# Altium PCB ISL6236A_DEMO.PcbDoc
Units mm, origin at the board's own origin, x right, y up, seen from the top; angles counter-clockwise.
Board outline 50 x 50 mm, 6 copper layers (L1, L2, L3, L4, L5, L6); 41 components, 27 nets, 119 pads, 54 vias.
Unrouted connection lines stored in the file: 1.
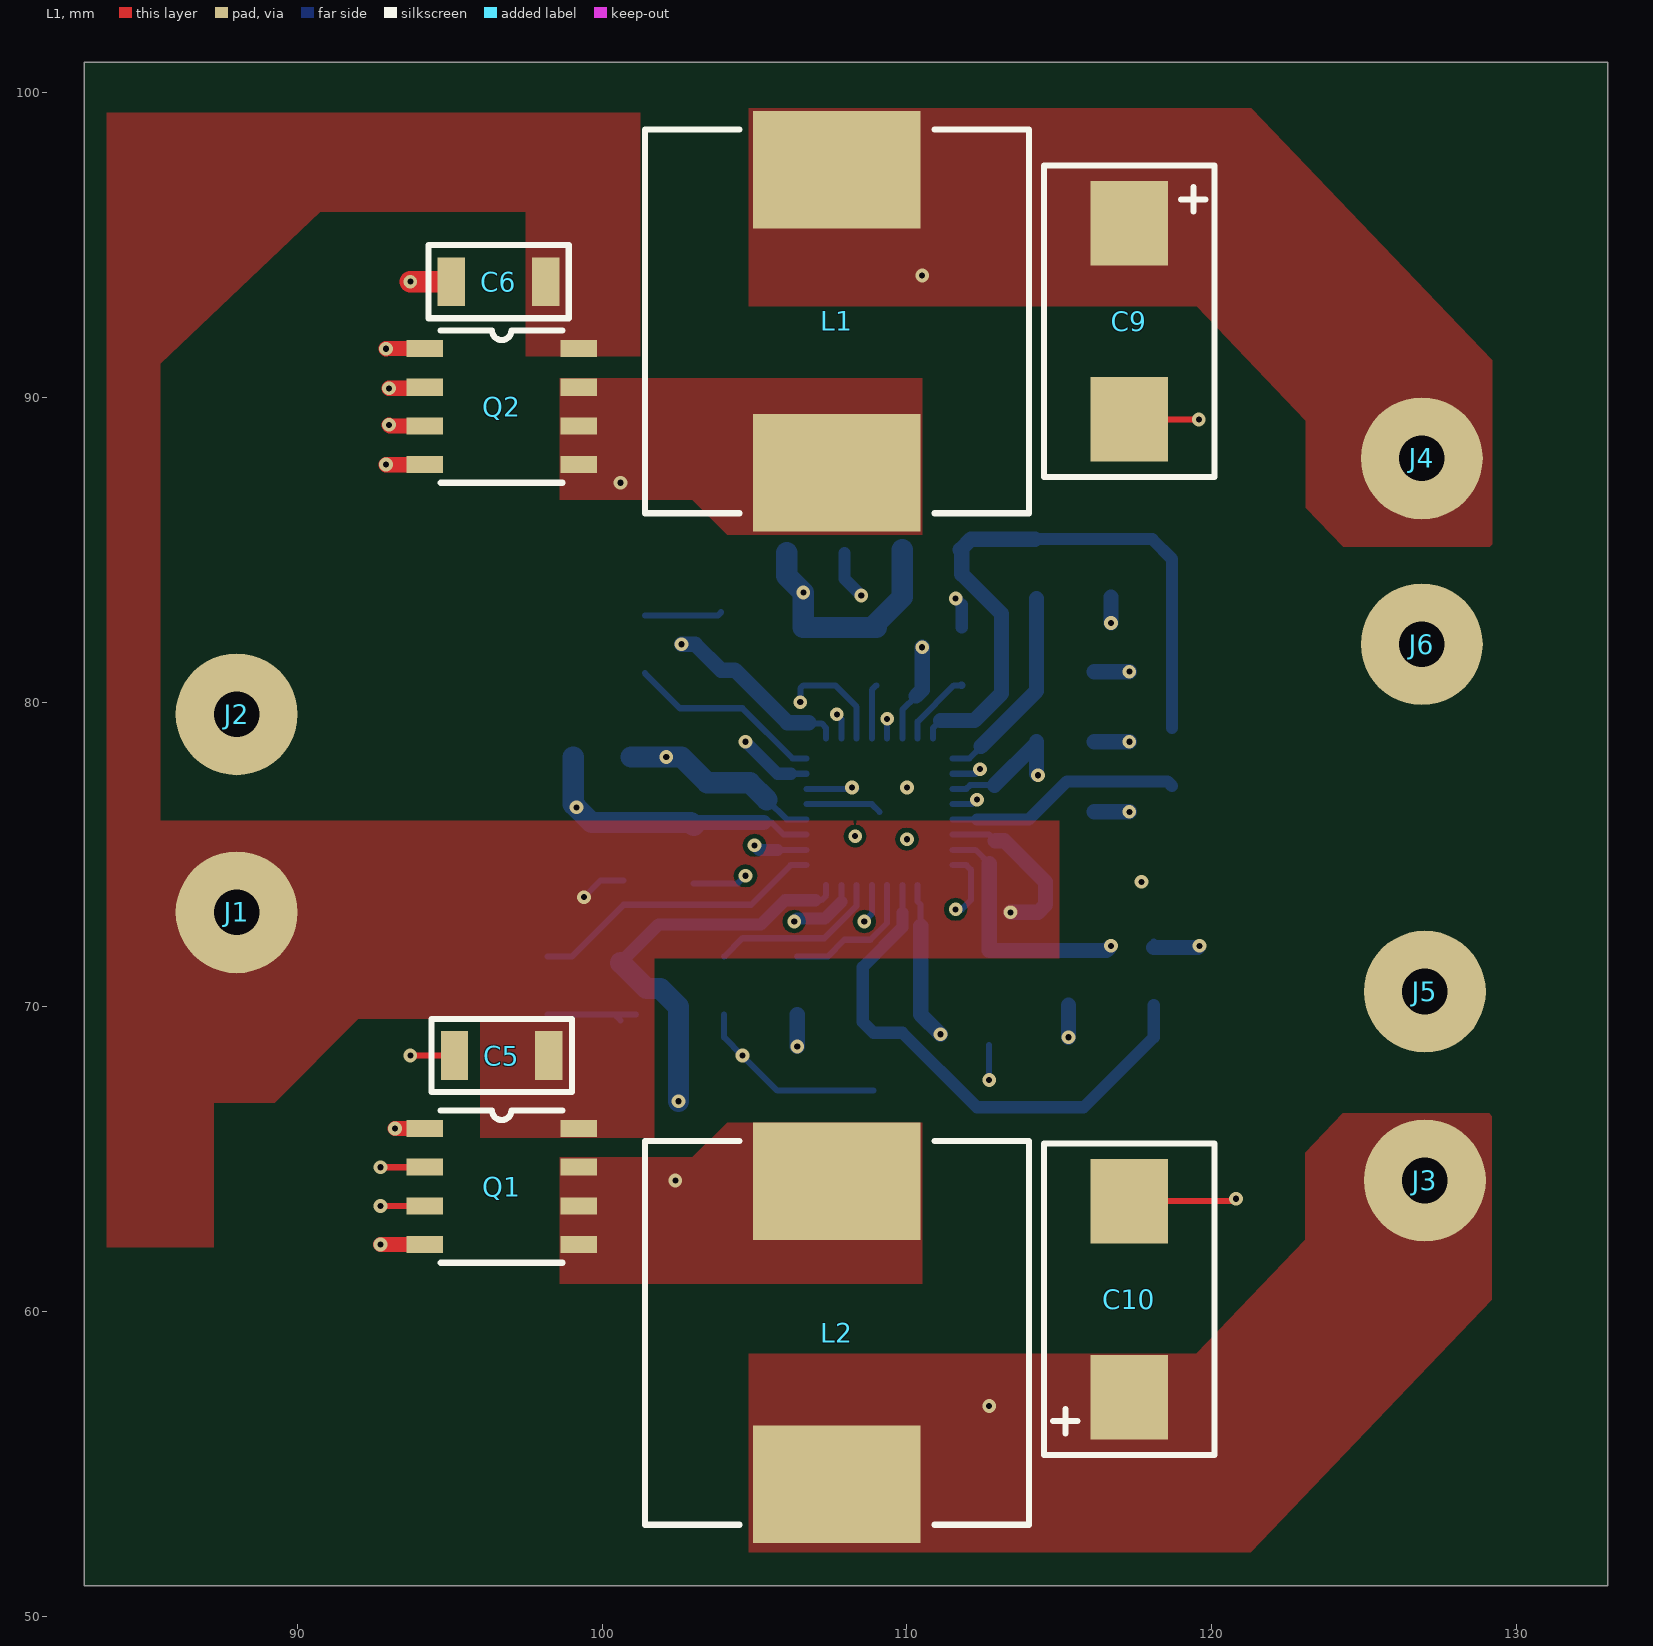
[diagram p0: L1 view]
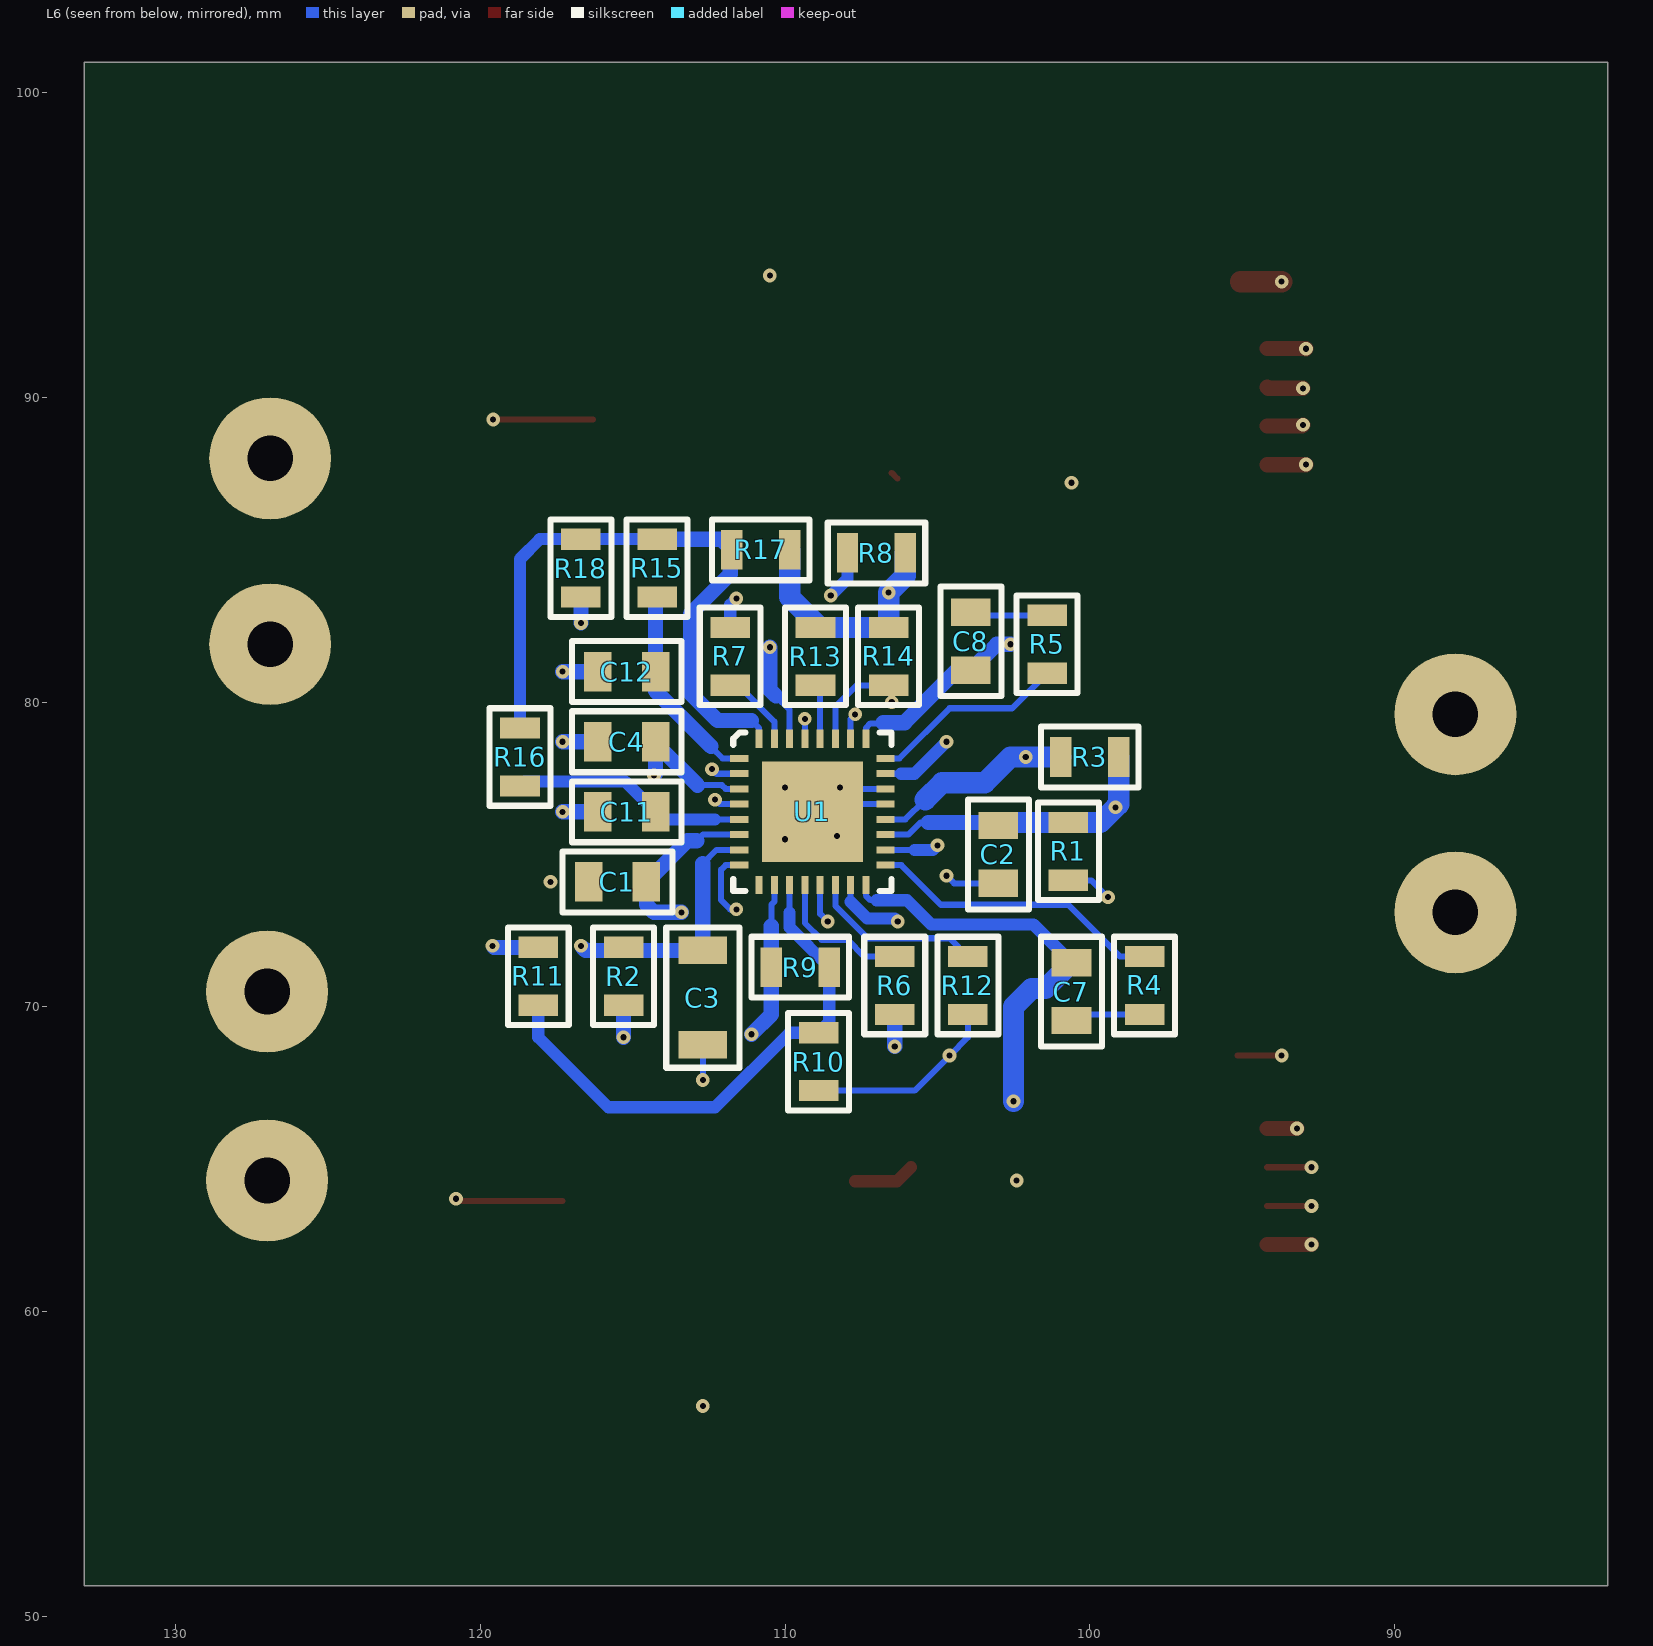
[diagram p1: L6 view, seen from below]
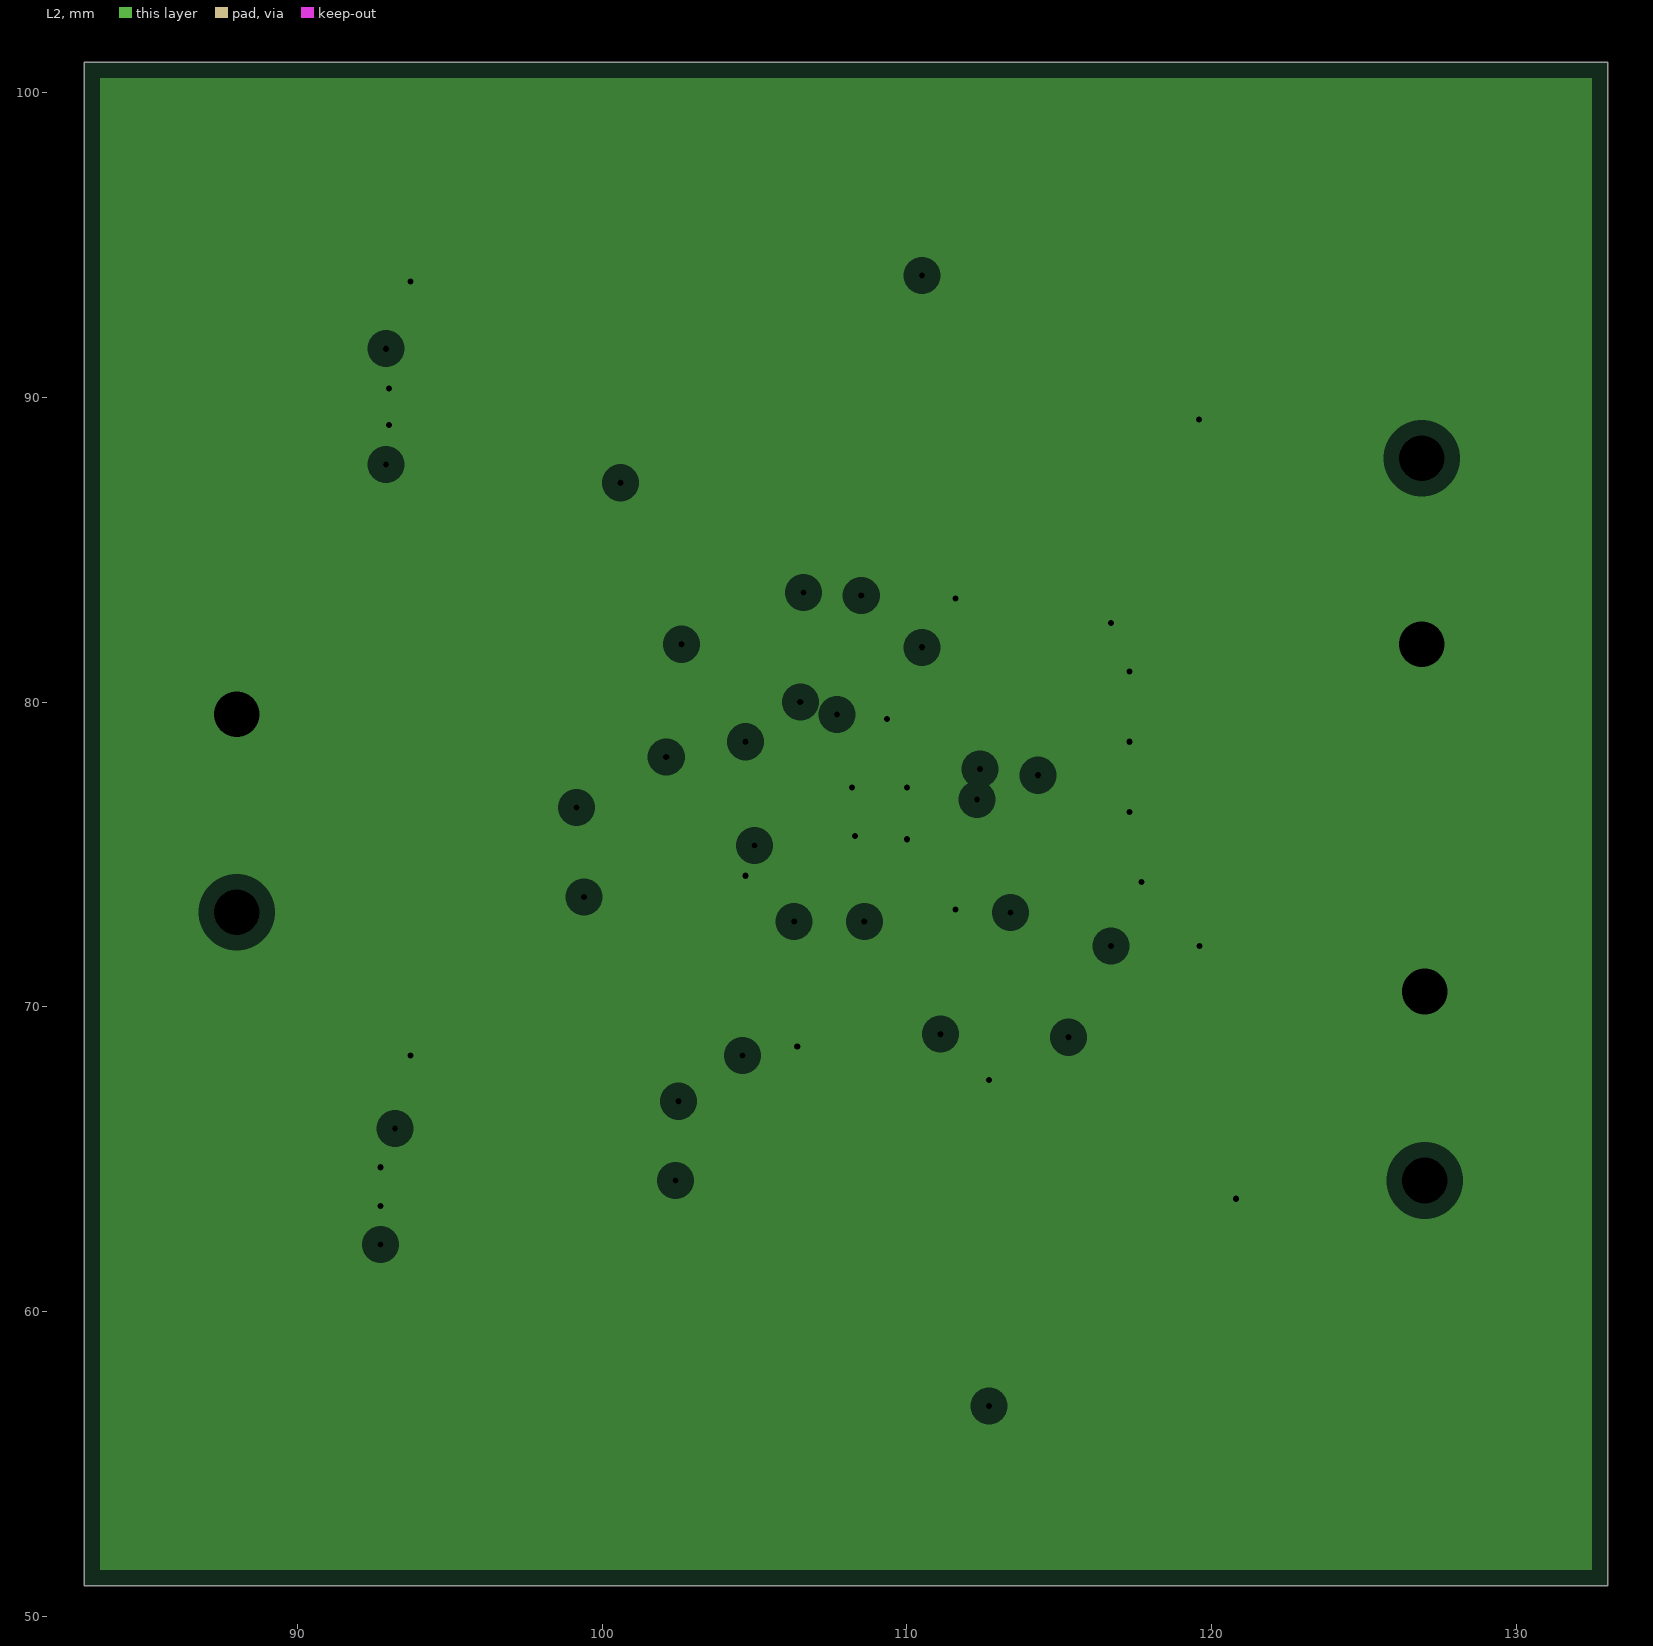
[diagram p2: L2, clearances drawn from the general rule]
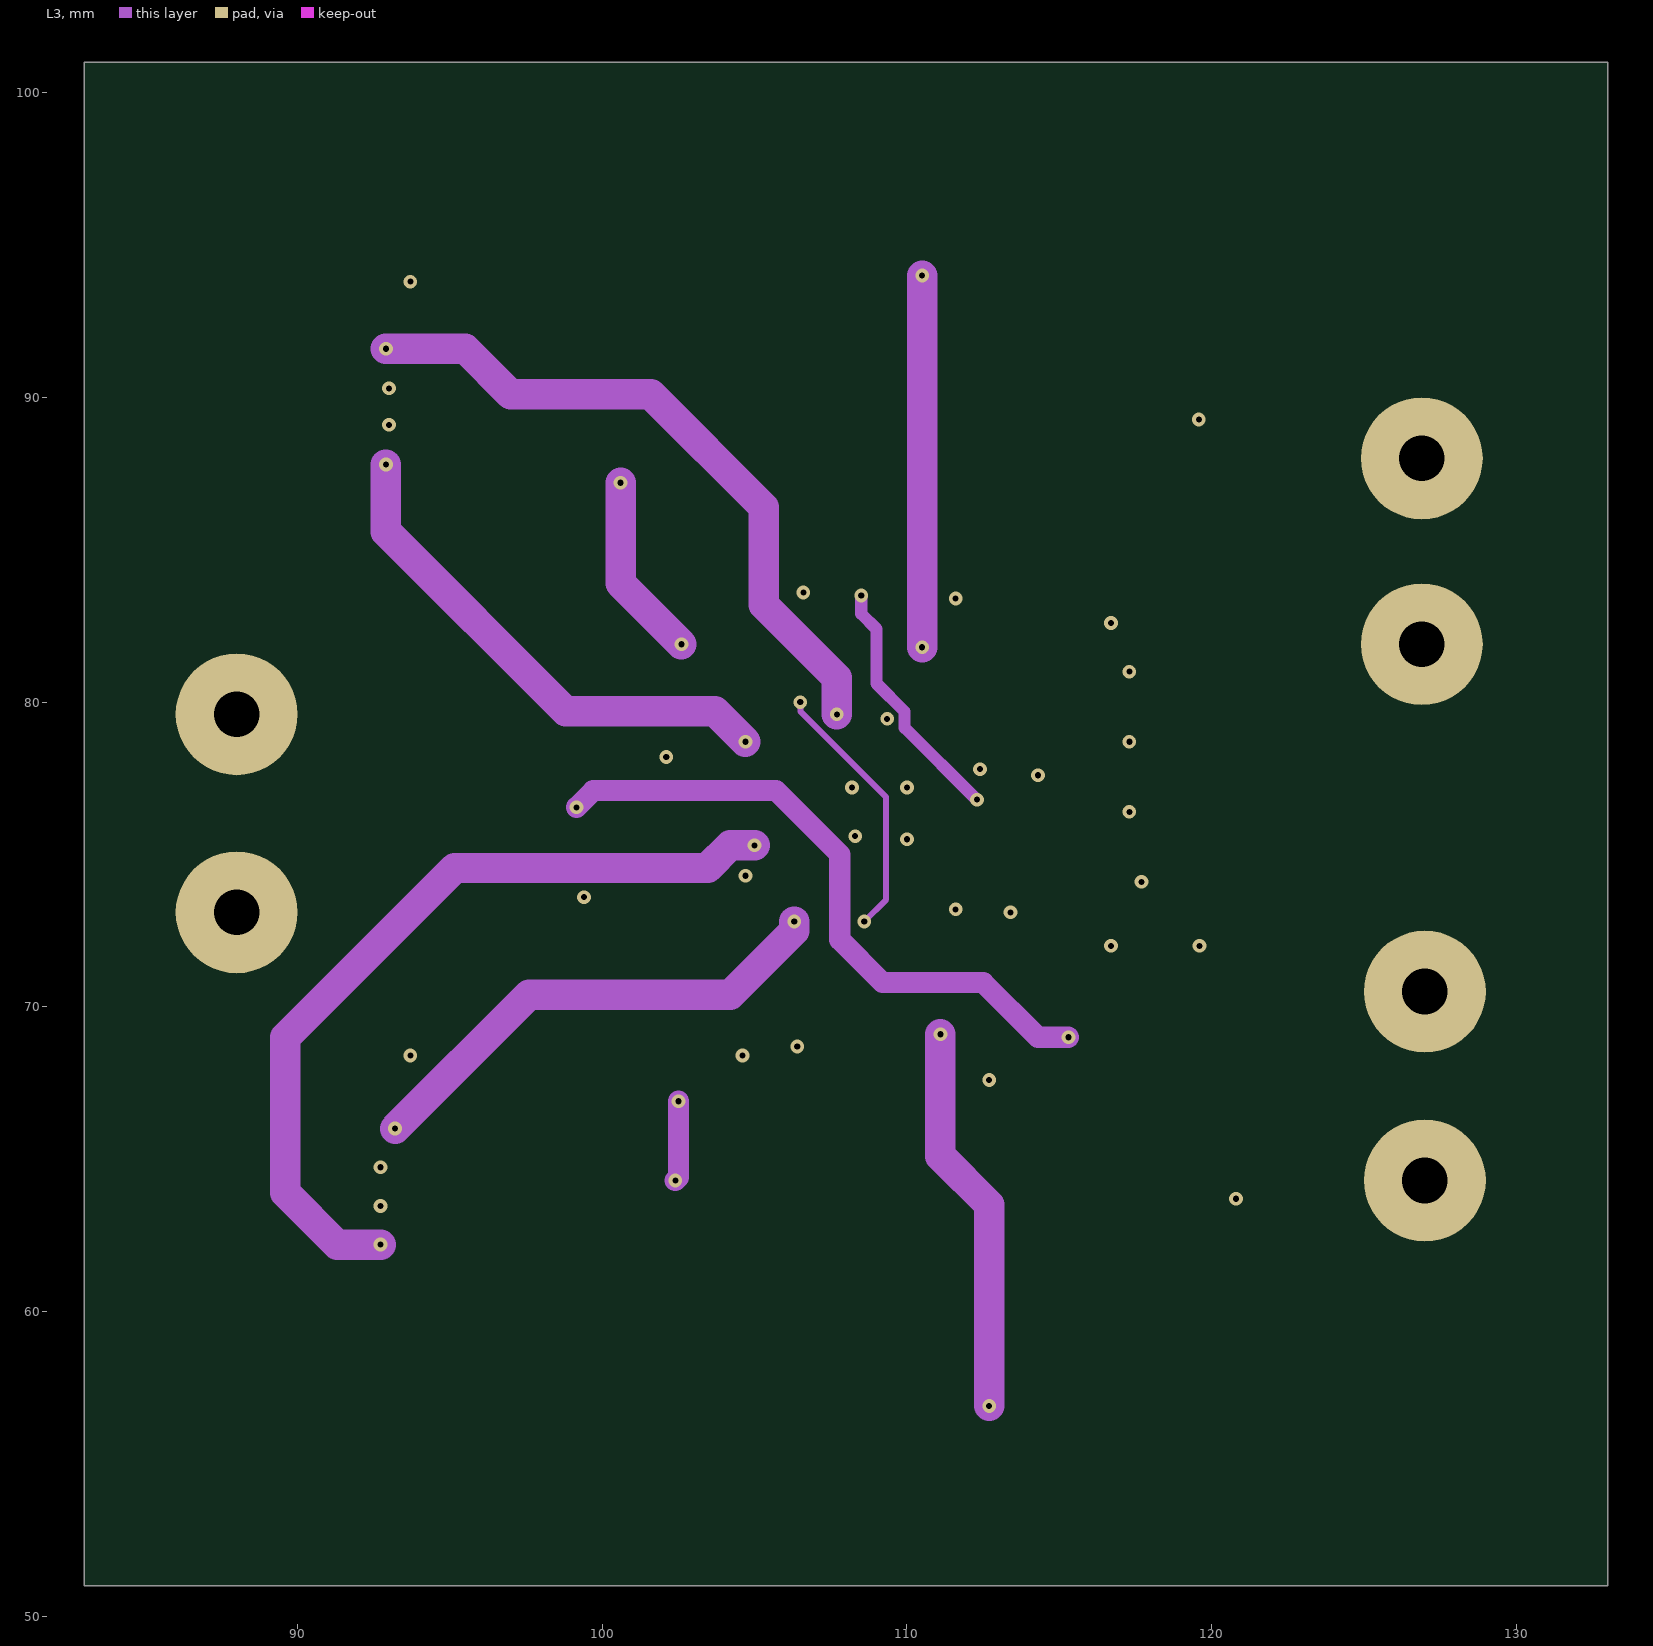
[diagram p3: L3]
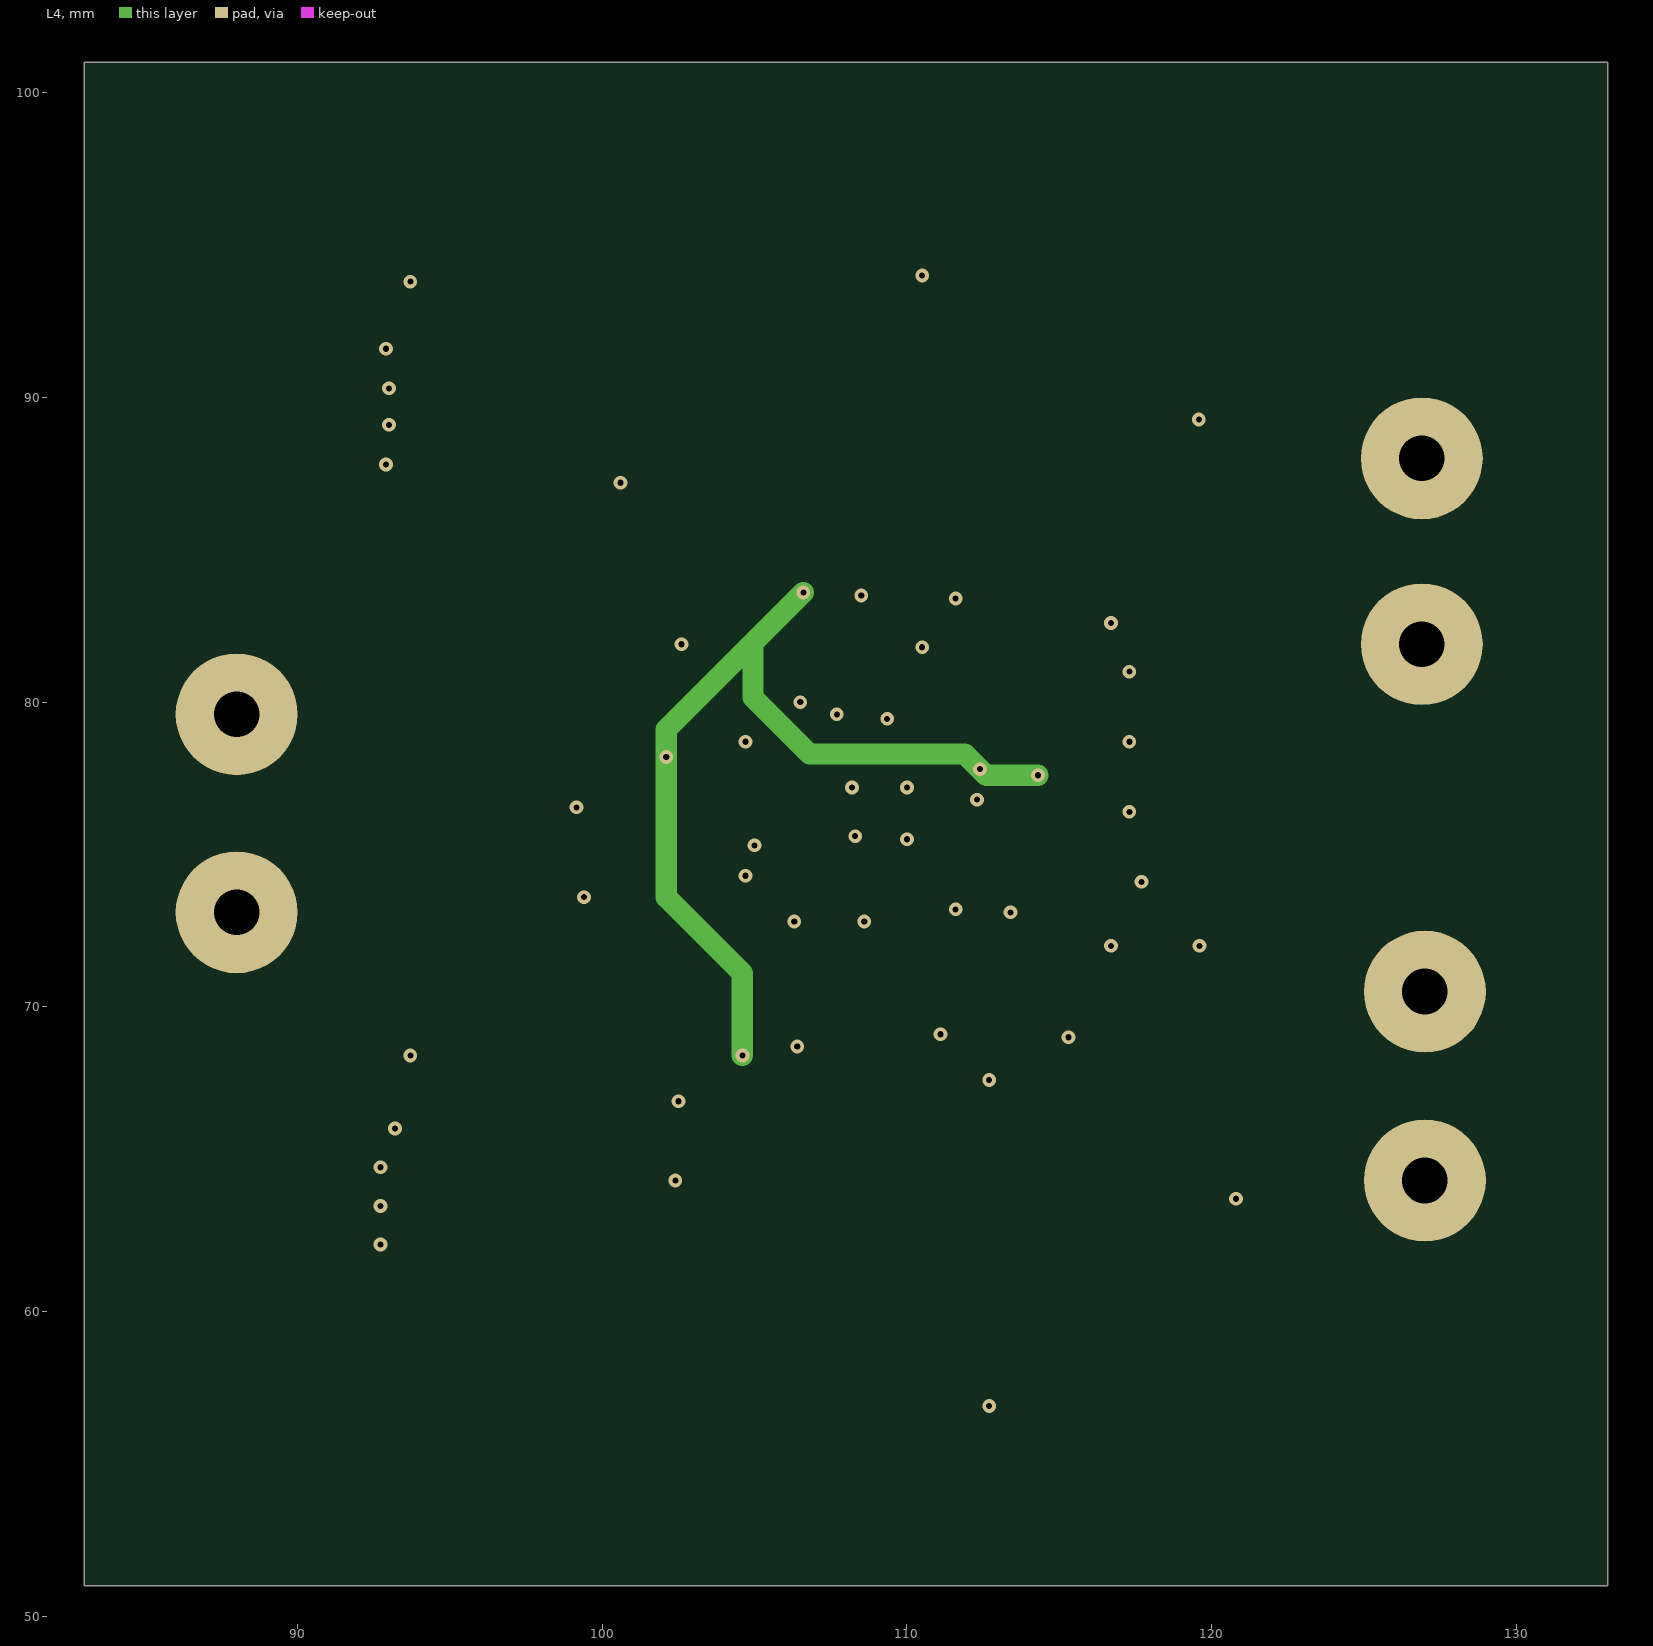
[diagram p4: L4]
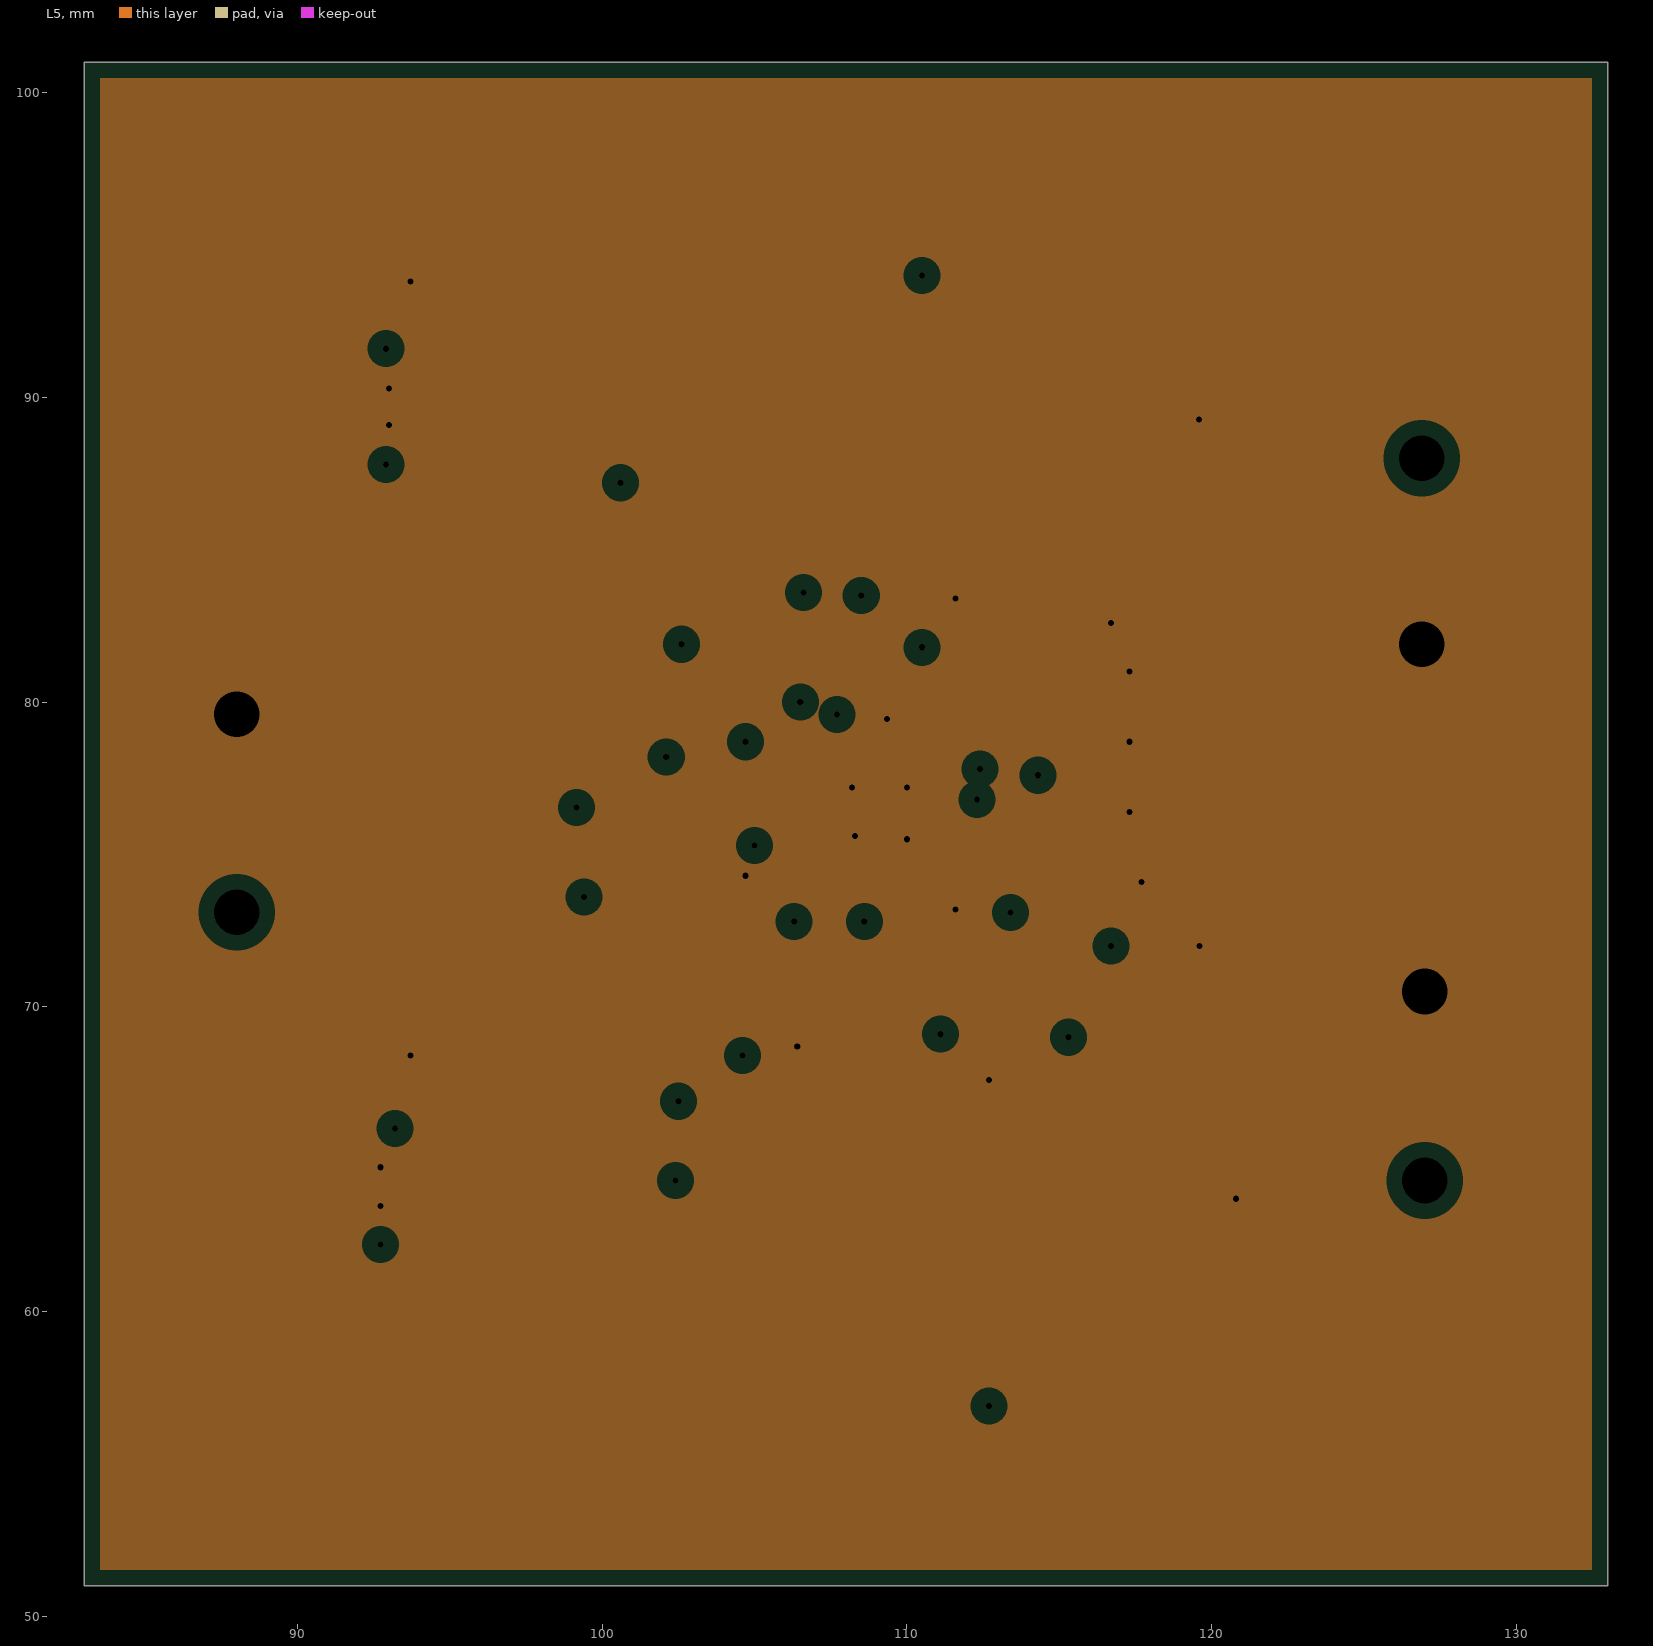
[diagram p5: L5, clearances drawn from the general rule]

## Layer stack, top to bottom
L1: signal copper 0.0356
Dielectric: core 0.32, FR-4, Dk 4.8
L2: plane copper 0.0356, net GND
Dielectric: prepreg 0.32, FR-4, Dk 4.8
L3: signal copper 0.0356
Dielectric: core 0.32, FR-4, Dk 4.8
L4: signal copper 0.0356
Dielectric: prepreg 0.32, FR-4, Dk 4.8
L5: plane copper 0.0356, net GND
Dielectric: core 0.32, FR-4, Dk 4.8
L6: signal copper 0.0356

## Board outline
83,101 83,51 133,51 133,101 83,101

## Design rules (kind name [scope] priority, off if disabled: settings)
Clearance [All] p1: gap=0.15
ComponentClearance [All] p1: gap=0.1 collisioncheckmode=3 verticalgap=0.1 showdistances=FALSE
HoleSize [All] p1: absolutevalues=TRUE maxlimit=10 minlimit=0.025 maxpercent=80.000 minpercent=20.000
HoleToHoleClearance [All] p1: gap=0.1 allowstackedmicrovias=TRUE
MinimumSolderMaskSliver [All] p1: minsoldermaskwidth=0.1
PlaneClearance [All] p1: clearance=0.508
PlaneConnect [All] p1: planeconnectstyle=Relief reliefexpansion=0.508 reliefentries=4 reliefconductorwidth=0.254 reliefairgap=0.254
PolygonConnect [All] p1: connectstyle=Direct reliefconductorwidth=0.254 reliefentries=4 polygonreliefangle="90 Angle"
RoutingVias [All] p1: holewidth=0.2 width=0.45 viastyle="Through Hole" minholewidth=0.1 minwidth=0.4 maxholewidth=10 maxwidth=10
SilkToSilkClearance [All] p1: silktosilkclearance=0.1
SilkscreenOverComponentPads [All] p1: minsilkscreentomaskgap=0.1
SolderMaskExpansion [All] p1: expansion=0.102
Width [All] p1: maxlimit=10 minlimit=0.15 preferedwidth=0.15
20 further rules are at their usual default settings.

## Components (designator, comment, footprint, x,y, rotation, side; value= is the part's Value field where it differs from the comment)
C1 "1uF" C0805 115.5,74.1 r180 bottom
C2 "1uF" C0805 103,75 r90 bottom
C3 "4.7uF" C1206 112.7,70.3 r90 bottom
C4 "1uF" C0805 115.2,78.7 r0 bottom
C5 "10uF" C1206 96.7,68.4 r0 top
C6 "10uF" C1206 96.6,93.8 r0 top
C7 "220nF" C0805 100.6,70.5 r270 bottom
C8 "220nF" C0805 103.9,82 r270 bottom
C9 "330, 10V, 4mOhm 399-10378-1-ND" C7343-43 117.3,92.5 r270 top
C10 "330UF, 6.3V, 9mOhm  399-10418-1-ND" C7343-31 117.3,60.4 r90 top
C11 "10nF" C0805 115.2,76.4 r0 bottom
C12 "100nF" C0805 115.2,81 r0 bottom
J1 "4mmx1.5m" PAD_WITH_HOLE_4MMx1.5MM#1 88,73.1 r0 top
J2 "4mmx1.5m" PAD_WITH_HOLE_4MMx1.5MM#1 88,79.6 r0 top
J3 "4mmx1.5m" PAD_WITH_HOLE_4MMx1.5MM#2 127.3,68.2 r0 top
J4 "4mmx1.5m" PAD_WITH_HOLE_4MMx1.5MM#3 127.1,88 r0 top
J5 "4mmx1.5m" PAD_WITH_HOLE_4MMx1.5MM#4 127.1,70.5 r0 top
J6 "4mmx1.5m" PAD_WITH_HOLE_4MMx1.5MM#5 130.1,81.9 r0 top
L1 "2.2uF 513-1662-1-ND" DR125 107.7,92.5 r90 top locked
L2 "3.3uF 513-1529-1-ND" DR125 107.7,59.3 r90 top locked
Q1 "SI4816BDY-T1-E3" SO-8 96.7,64.1 r0 top locked
Q2 "SI4816BDY-T1-E3" SO-8 96.7,89.7 r0 top
R1 "0R" R0805 100.7,75.1 r90 bottom
R2 "0R" R0805 115.3,71 r90 bottom
R3 "10R" R0805 100,78.2 r0 bottom
R4 "1R" R0805 98.2,70.7 r90 bottom
R5 "1R" R0805 101.4,81.9 r90 bottom
R6 "200K" R0805 106.4,70.7 r90 bottom
R7 "200K" R0805 111.8,81.5 r90 bottom
R8 "10K" R0805 107,84.9 r180 bottom
R9 "DNF" R0805 109.5,71.3 r0 bottom
R10 "0R" R0805 108.9,68.2 r270 bottom
R11 "DNF" R0805 118.1,71 r270 bottom
R12 "10K" R0805 104,70.7 r270 bottom
R13 "200K" R0805 109,81.5 r90 bottom
R14 "200K" R0805 106.6,81.5 r90 bottom
R15 "DNF" R0805 114.2,84.4 r270 bottom
R16 "0R" R0805 118.7,78.2 r270 bottom
R17 "DNF" R0805 110.8,85 r180 bottom
R18 "DNF" R0805 116.7,84.4 r90 bottom
U1 "ISL6236AIRZ-ND" L32.5x5B 109.1,76.4 r180 bottom locked

## Footprints (in the part's own frame and the unit in brackets; to place one, negate y for a bottom-side part, rotate by r counter-clockwise, add the part's x,y. Pads: shape width x height; smd on the part's side, far side on the other; paste and mask are expansions set on the pad)
C0805 [mm]
  rect 0.9x1.3 smd: 1(-0.95,0) 2(0.95,0)
  silkscreen extent -1.8,-1 1.8,1
C1206 [mm]
  rect 0.9x1.6 smd: 1(-1.55,0) 2(1.55,0)
  silkscreen extent -2.3,-1.2 2.3,1.2
C7343-31 [mm]
  rect 2.77x2.55 smd: 1(-3.22,0) 2(3.22,0)
  silkscreen extent -5.11,-2.8 5.11,2.8
C7343-43 [mm]
  rect 2.77x2.55 smd: 1(-3.22,0) 2(3.22,0)
  silkscreen extent -5.11,-2.8 5.11,2.8
DR125 [mm]
  rect 3.85x5.5 smd: 1(-4.975,0) 2(4.975,0)
  silkscreen extent -6.3,-6.3 6.3,6.3
L32.5x5B [mm]
  rect 0.6x0.23 smd mask+0.051: 1(-2.4,1.75) 2(-2.4,1.25) 3(-2.4,0.75) 4(-2.4,0.25) 5(-2.4,-0.25) 6(-2.4,-0.75) 7(-2.4,-1.25) 8(-2.4,-1.75) 17(2.4,-1.75) 18(2.4,-1.25) 19(2.4,-0.75) 20(2.4,-0.25) 21(2.4,0.25) 22(2.4,0.75) 23(2.4,1.25) 24(2.4,1.75)
  rect 0.23x0.6 smd mask+0.051: 9(-1.75,-2.4) 10(-1.25,-2.4) 11(-0.75,-2.4) 12(-0.25,-2.4) 13(0.25,-2.4) 14(0.75,-2.4) 15(1.25,-2.4) 16(1.75,-2.4) 25(1.75,2.4) 26(1.25,2.4) 27(0.75,2.4) 28(0.25,2.4) 29(-0.25,2.4) 30(-0.75,2.4) 31(-1.25,2.4) 32(-1.75,2.4)
  rect 3.3x3.3 smd mask+0.051: 33(0,0)
  silkscreen extent -2.6,-2.6 2.6,2.6
PAD_WITH_HOLE_4MMx1.5MM#1 [mm]
  round 4 hole 1.5: 1(0,0)
PAD_WITH_HOLE_4MMx1.5MM#2 [mm]
  round 4 hole 1.5: 1(-0.3,-3.9)
PAD_WITH_HOLE_4MMx1.5MM#3 [mm]
  round 4 hole 1.5: 1(-0.2,0)
PAD_WITH_HOLE_4MMx1.5MM#4 [mm]
  round 4 hole 1.5: 1(-0.1,0)
PAD_WITH_HOLE_4MMx1.5MM#5 [mm]
  round 4 hole 1.5: 1(-3.2,0)
R0805 [mm]
  rect 0.7x1.3 smd: 1(-0.95,0) 2(0.95,0)
  silkscreen extent -1.6,-1 1.6,1
SO-8 [mm]
  rect 1.194x0.559 smd: 1(-2.527,1.905) 2(-2.527,0.635) 3(-2.527,-0.635) 4(-2.527,-1.905) 5(2.528,-1.905) 6(2.528,-0.635) 7(2.528,0.635) 8(2.528,1.905)
  silkscreen extent -2,-2.5 2,2.5

## Part data
C1 C2 C4: library part CL21B105KBFNNNE, "CAP CER 1UF 50V 10% X7R 0805"
C3: library part CL31A475KPHNNNE, "CAP CER 4.7UF 10V 10% X5R 1206"
C5 C6: library part GRM32DF51H106ZA01L, "CAP CER 10UF 50V Y5V 1210"
C7 C8: library part UMK212B7224KG-T, "CAP CER 0.22UF 50V 10% X7R 0805"
C9: library part T530X337M010ATE004, "CAP TANT 330UF 10V 20% 2917"
C10: library part T520D337M006ATE009, "CAP TANT 330UF 6.3V 20% 2917"
C11: library part C0805C103K5RACTU, "CAP CER 10000PF 50V 10% X7R 0805"
C12: library part C0805C104K5RACTU, "CAP CER 0.1UF 50V 10% X7R 0805"
J1 J2 J3 J4 J5 J6: library part PAD_WITH_HOLE_4mmx1.5mm, "Pad with hole with 4mmx1.5mm"
L1: library part DR125-2R2-R, "FIXED IND 2.2UH 10.9A 4.5 MOHM"
L2: library part DR125-3R3-R, "FIXED IND 3.3UH 9.26A 6.3 MOHM"
Q1 Q2: "MOSFET 2N-CH 30V 5.8A 8-SOIC"
R1 R2 R10 R16: library part ERJ-6GEY0R00V, "RES 0.0 OHM 1/8W JUMP 0805 SMD"
R3: library part ERJ-6ENF10R0V, "RES 10 OHM 1/8W 1% 0805 SMD"
R4 R5: library part ERJ-6RQF1R0V, "RES 1 OHM 1/8W 1% 0805 SMD"
R6 R7 R13 R14: library part RMCF0805FT200K, "RES 200K OHM 1/8W 1% 0805"
R8 R12: library part ERJ-6GEYJ103V, "RES 10K OHM 1/8W 5% 0805 SMD"
R9 R11 R15 R17 R18: library part RES
U1: library part ISL6236AIRZ, "IC MAIN PWR CTRLR QUAD 32-QFN"

## Via types
v1: diameter 0.45, hole 0.2, L1 to L6, 54 vias

## Nets (pads, with @x,y where several pads share a name; then routed paths per layer and width w, separated by ;. In a path a pad name is that pad's centre, name@x,y a point inside that pad or via, vN(x,y) a via of type N, cw(c..) or ccw(c..) an arc to the next point about the centre after c; other vN are vias at no path point)
+1V5: C10.1 J3.1 L2.1 R9.2 U1.10 | length 18.3
  L1 w0.2: v1(111.1,69.1) v1@111.1,69.2
  L3 w1: v1(111.1,69.1) 111.1,65.1 112.7,63.5 v1(112.7,56.9)
  L6 w0.2: R9.2@110.35,71.4 R9.2 ; U1.10 110.35,73.45 110.45,73.35 110.45,72.65
  L6 w0.5: 110.45,72.65 R9.2 110.45,69.75 v1(111.1,69.1)
+1V05: C9.1 J4.1 L1.2 U1.30 | length 15.5
  L3 w1: v1(110.5,81.8) v1(110.5,94)
  L6 w0.2: U1.30 109.85,79.75 110.3,80.2
  L6 w0.5: 110.3,80.2 110.5,80.4 v1(110.5,81.8)
+5V_LDO: C3.2 R2.2 U1.7 | length 8.3
  L6 w0.2: U1.7 112.25,75.15 112.7,74.7 ; v1@116.65,71.95 v1(116.7,72)
  L6 w0.5: 112.7,74.7 C3.2 116.55,71.85 v1@116.65,71.95
+5V_PVCC: C2.2 R1.2 R2.1 R3.1 U1.19 | length 32.3
  L3 w0.2: v1@115.3,68.9 v1(115.3,69)
  L3 w0.7: v1(99.154,76.546) 99.709,77.1 105.7,77.1 107.8,75 107.8,72.2 109.2,70.8 112.5,70.8 114.3,69 v1(115.3,69)
  L6 w0.2: 105.3,76.05 105.55,76.05 105.95,75.65 U1.19 ; v1@115.3,68.9 v1(115.3,69)
  L6 w0.5: C2.2 103.1,76.05 105.3,76.05 ; v1(115.3,69) R2.1
  L6 w0.7: R3.1 99.05,76.65 v1(99.154,76.546) 99.65,76.05 R1.2 102.9,76.05 C2.2
+5V_VCC: C4.1 R3.2 R8.2 R10.2 R12.2 R13.2 R14.2 R17.2 U1.2 U1.3 U1.20 | length 56.4
  L4 w0.7: v1(104.6,68.4) 104.6,71.1 102.1,73.6 v1(102.1,78.2) 102.1,79.1 104.95,81.95 ; v1(106.6,83.6) 104.95,81.95 ; v1(114.3,77.6) 112.6,77.6 v1(112.4,77.8) 111.9,78.3 106.8,78.3 104.95,80.15 104.95,81.95
  L6 w0.2: R12.2 104,69 v1(104.6,68.4) 105.75,67.25 R10.2 ; 105.421,76.779 106.05,76.15 U1.20 ; U1.3 111.95,77.15 112.075,77.275 112.875,77.275 ; U1.2 v1@112.25,77.65
  L6 w0.5: 112.875,77.275 C4.1@114.25,78.65 ; v1@114.25,77.65 C4.1@114.25,78.65 ; C4.1 C4.1@114.25,78.65
  L6 w0.7: R3.2 v1(102.1,78.2) 102.6,78.2 103.45,77.35 104.85,77.35 105.4,76.8 ; R8.2 106.05,84.15 v1(106.6,83.6) R14.2 R13.2 109,82.6 109.85,83.45 R17.2
+REF: C12.1 R15.2 U1.1 | length 6.8
  L6 w0.2: U1.1 112.05,78.15 112.433,78.533 112.433,78.548 ; R15.2 R15.2@114.25,83.4
  L6 w0.5: 112.433,78.548 114.25,80.366 C12.1 R15.2@114.25,83.4
+VIN: C1.2 C5.2 C6.2 J1.1 Q1.8 Q2.8 R1.1 U1.6 | length 7.2
  L6 w0.2: v1(99.4,73.6) 99.95,74.15 R1.1 ; U1.6 112.7,75.65 112.9,75.45
  L6 w0.5: 112.9,75.45 113.2,75.45 C1.2 114.55,73.35 114.3,73.1 v1(113.4,73.1)
+VREF3: C11.1 R16.2 U1.5 | length 7.8
  L6 w0.2: U1.5 112.3,76.15
  L6 w0.4: 112.3,76.15 114,76.15 C11.1 115.25,77.4 118.55,77.4 R16.2
EN1: R12.1 U1.14 | length 5.7
  L6 w0.2: R12.1 104.6,72.25 107.286,72.25 108.35,73.314 108.35,73.35 U1.14
EN_LDO: R8.1 U1.4 | length 10.8
  L3 w0.4: v1(108.5,83.5) 108.5,82.9 109,82.4 109,80.613 109.925,79.688 109.925,79.162 112.287,76.8 v1(112.3,76.8)
  L6 w0.2: U1.4 112.15,76.65 v1(112.3,76.8)
  L6 w0.4: R8.1 107.95,84.05 v1(108.5,83.5)
FB1: R9.1 R10.1 R11.2 U1.11 | length 17.8
  L6 w0.2: 109.85,73.1 U1.11
  L6 w0.4: 109.85,73.1 109.85,72.6 R9.1 108.55,69.5 R10.1 109.85,69.15 112.3,66.7 115.8,66.7 118.1,69 R11.2
GND: C1.1 C2.1 C3.1 C4.2 C5.1 C6.1 C9.2 C10.2 C11.2 C12.2 J2.1 J5.1 J6.1 Q1.2 Q1.3 Q2.2 Q2.3 R6.1 R7.2 R11.1 R18.1 U1.8 U1.21 U1.22 U1.29 U1.33 | length 33.6
  L1 w0.2: v1(92.722,63.465) Q1.3 ; v1(92.722,64.735) Q1.2 ; v1(93.7,68.4) C5.1 ; C9.2@116.3,89.28 v1(119.58,89.28) v1@119.6,89.3 ; C10.2 120.72,63.62 v1(120.8,63.7)
  L1 w0.5: v1(93,89.1) 93.035,89.065 Q2.3 ; v1(93,90.3) 94.138,90.3 Q2.2
  L1 w0.7: v1(93.7,93.8) C6.1
  L6 w0.2: C2.1 104.45,74.05 v1(104.7,74.3) ; U1.21 108.85,76.65 U1.33 ; U1.22 U1.33@108.35,77.15 ; U1.29 v1(109.35,79.45) ; U1.8 111.95,74.65 112.1,74.5 112.1,73.5 111.8,73.2 v1(111.6,73.2) ; v1@112.7,67.5 C3.1 ; v1@116.7,82.5 v1(116.7,82.6) ; v1(117.3,76.4) v1@117.4,76.4 ; v1(117.3,78.7) v1@117.4,78.7 ; v1(117.3,81) v1@117.4,81 ; R11.1 R11.1@118.1,72.15 ; v1@119.55,71.95 v1(119.6,72)
  L6 w0.4: v1(111.6,83.4) 111.8,83.2 R7.2
  L6 w0.5: v1(106.4,68.7) R6.1 ; C11.2 v1(117.3,76.4) ; C4.2 v1(117.3,78.7) ; C12.2 v1(117.3,81) ; v1(116.7,82.6) R18.1 ; R11.1 v1@119.55,71.95
  other v1: 112.7,67.6 117.7,74.1 110,75.5 108.3,75.6 108.2,77.2 110,77.2
ILIM2: R7.1 U1.31 | length 2.5
  L6 w0.2: U1.31 110.35,79.357 111.543,80.55 R7.1
  L6 w0.254: R7.1@111.793,80.55 R7.1
LGATE1: Q1.4 U1.18 | length 30.2
  L1 w0.5: v1(92.722,62.195) Q1.4
  L3 w1: v1(92.722,62.195) 91.305,62.195 89.6,63.9 89.6,69 95.156,74.556 103.456,74.556 104.2,75.3 v1(105,75.3)
  L6 w0.2: 105.75,75.15 U1.18
  L6 w0.4: v1(105,75.3) 105.15,75.15 105.75,75.15
LGATE2: Q2.4 U1.23 | length 20.6
  L1 w0.5: v1(92.9,87.8) 92.905,87.795 Q2.4
  L3 w1: v1(92.9,87.8) 92.9,85.6 98.8,79.7 103.7,79.7 v1(104.7,78.7)
  L6 w0.2: 106.2,77.65 U1.23
  L6 w0.4: v1(104.7,78.7) 105.75,77.65 106.2,77.65
NetC7_2: C7.2 R4.1 | length 4.6
  L6 w0.2: R4.1 100.4,69.75 C7.2 ; 99,69.75 C7.2@101.1,69.75
NetC8_1: C8.1 R5.2 | length 2.5
  L6 w0.2: R5.2 103.8,82.85 C8.1
NetR4_2: R4.2 U1.17 | length 9.7
  L6 w0.2: R4.2 99,71.65 100.7,73.35 104.886,73.35 106.186,74.65 U1.17
NetR5_1: R5.1 U1.24 | length 6.5
  L6 w0.2: R5.1 102.55,79.8 104.6,79.8 106.25,78.15 U1.24 U1.24@106.65,78.15
NetR6_2: R6.2 U1.12 | length 4.7
  L6 w0.2: R6.2 107.4,71.65 107.95,72.2 108.8,72.2 109.35,72.75 U1.12
PHASE1: C7.1 L2.2 Q1.5 Q1.6 Q1.7 U1.16 | length 18.4
  L1 w0.4: L2.2@105.865,64.735 106.325,64.275 L2.2
  L3 w0.7: v1(102.4,64.3) 102.5,64.4 v1(102.5,66.9)
  L6 w0.2: 107,73.5 107.2,73.5 107.35,73.65 U1.16 U1.16@107.35,73.85
  L6 w0.4: C7.1 101.85,72.7 105.2,72.7 106,73.5 107,73.5
  L6 w0.7: C7.1 101.45,70.6 101.9,70.6 102.5,70 v1(102.5,66.9)
PHASE2: C8.2 L1.1 Q2.5 Q2.6 Q2.7 U1.25 | length 12.9
  L1 w0.2: L1.1@106.31,87.335 L1.1@106.5,87.525
  L3 w1: v1(100.6,87.2) 100.6,83.9 v1(102.6,81.9)
  L6 w0.2: C8.2 C8.2@104.15,81.05 ; 106.775,79.325 106.8,79.3 107.2,79.3 107.35,79.15 U1.25
  L6 w0.5: v1(102.6,81.9) 103.05,81.9 C8.2 104.35,81.05 106.075,79.325 106.775,79.325
POK1: R14.1 U1.13 U1.27 | length 14.4
  L3 w0.2: v1(106.5,80) 106.5,79.7 109.318,76.882 109.318,73.518 v1(108.6,72.8)
  L6 w0.2: v1@106.5,79.9 106.5,80.45 R14.1 ; v1@106.5,79.9 v1(106.5,80) ; R14.1@107.15,80.55 R14.1 ; U1.27 108.35,79.846 107.646,80.55 R14.1 ; v1(108.6,72.8) 108.85,73.05 U1.13
POK2: R13.1 U1.28 | length 1.8
  L6 w0.2: U1.28 108.85,80.4 R13.1
REFIN2: R15.1 R16.1 R17.1 R18.2 U1.32 | length 21.3
  L6 w0.2: U1.32 110.85,79.15 111.1,79.4
  L6 w0.4: R15.1 R18.2 118.05,85.35 118.7,84.7 R16.1
  L6 w0.5: 111.1,79.4 112.216,79.4 113.1,80.284 113.1,82.9 111.8,84.2 111.8,84.55 111.8,84.95 R17.1 112.1,85.35 R15.1
UGATE1: Q1.1 U1.15 | length 19.4
  L1 w0.5: v1(93.2,66.005) Q1.1
  L3 w1: v1(93.2,66.005) 97.595,70.4 104.2,70.4 106.3,72.5 v1(106.3,72.8)
  L6 w0.2: 107.85,73.45 U1.15
  L6 w0.4: v1(106.3,72.8) 106.4,72.9 107.3,72.9 107.85,73.45
UGATE2: Q2.1 U1.26 | length 24.5
  L1 w0.5: v1(92.9,91.6) 92.905,91.605 Q2.1
  L3 w1: v1(92.9,91.6) 95.5,91.6 97,90.1 101.6,90.1 105.3,86.4 105.3,83.2 107.7,80.8 v1(107.7,79.6)
  L6 w0.2: v1(107.7,79.6) 107.85,79.45 U1.26
pads on no net: U1.9

## Polygon pours and split planes (outlines as drawn)
+VIN on L1 "Bottom Layer-No Net" (solid): 83.742,62.1 87.242,62.1 87.242,66.85 89.242,66.85 91.992,69.6 95.992,69.6 96,65.7 101.7,65.7 101.7,71.6 114.992,71.6 114.992,76.1 85.492,76.1 85.492,91.1 90.742,96.1 97.492,96.1 97.492,91.35 101.242,91.35 101.242,99.35 83.742,99.35
PHASE2 on L1 "Bottom Layer-No Net" (solid, pour order 1001): 98.6,86.645 98.6,90.625 110.5,90.625 110.5,85.5 104.1,85.5 102.956,86.644 102.956,86.645
+1V05 on L1 "Bottom Layer-No Net" (solid): 104.814,92.99 104.814,99.5 121.3,99.5 129.214,91.215 129.214,88.158 129.214,85.1 124.315,85.1 123.09,86.382 123.09,89.242 119.51,92.99
+1V5 on L1 "Bottom Layer-No Net" (solid): 104.8,58.61 104.8,52.1 121.286,52.1 129.2,60.385 129.2,63.442 129.2,66.5 124.301,66.5 123.076,65.218 123.076,62.358 119.497,58.61
PHASE1 on L1 "Bottom Layer-No Net" (solid, pour order 1001): 98.6,65.055 98.6,60.909 110.5,60.909 110.5,66.2 104.1,66.2 102.956,65.056 102.956,65.055 98.6,65.055
GND on L2 (split plane): 132.49,51.51 83.51,51.51 83.51,100.49 132.49,100.49
GND on L5 (split plane): 132.49,51.51 83.51,51.51 83.51,100.49 132.49,100.49